# Altium PCB Altium-PCB_PowerSupply_2023-12-20.pcbdoc
Units mm, origin at the board's own origin, x right, y up, seen from the top; angles counter-clockwise.
Board outline 147.32 x 85.72 mm, 2 copper layers (Top Layer, Bottom Layer); 36 components, 23 nets, 101 pads, 0 vias.
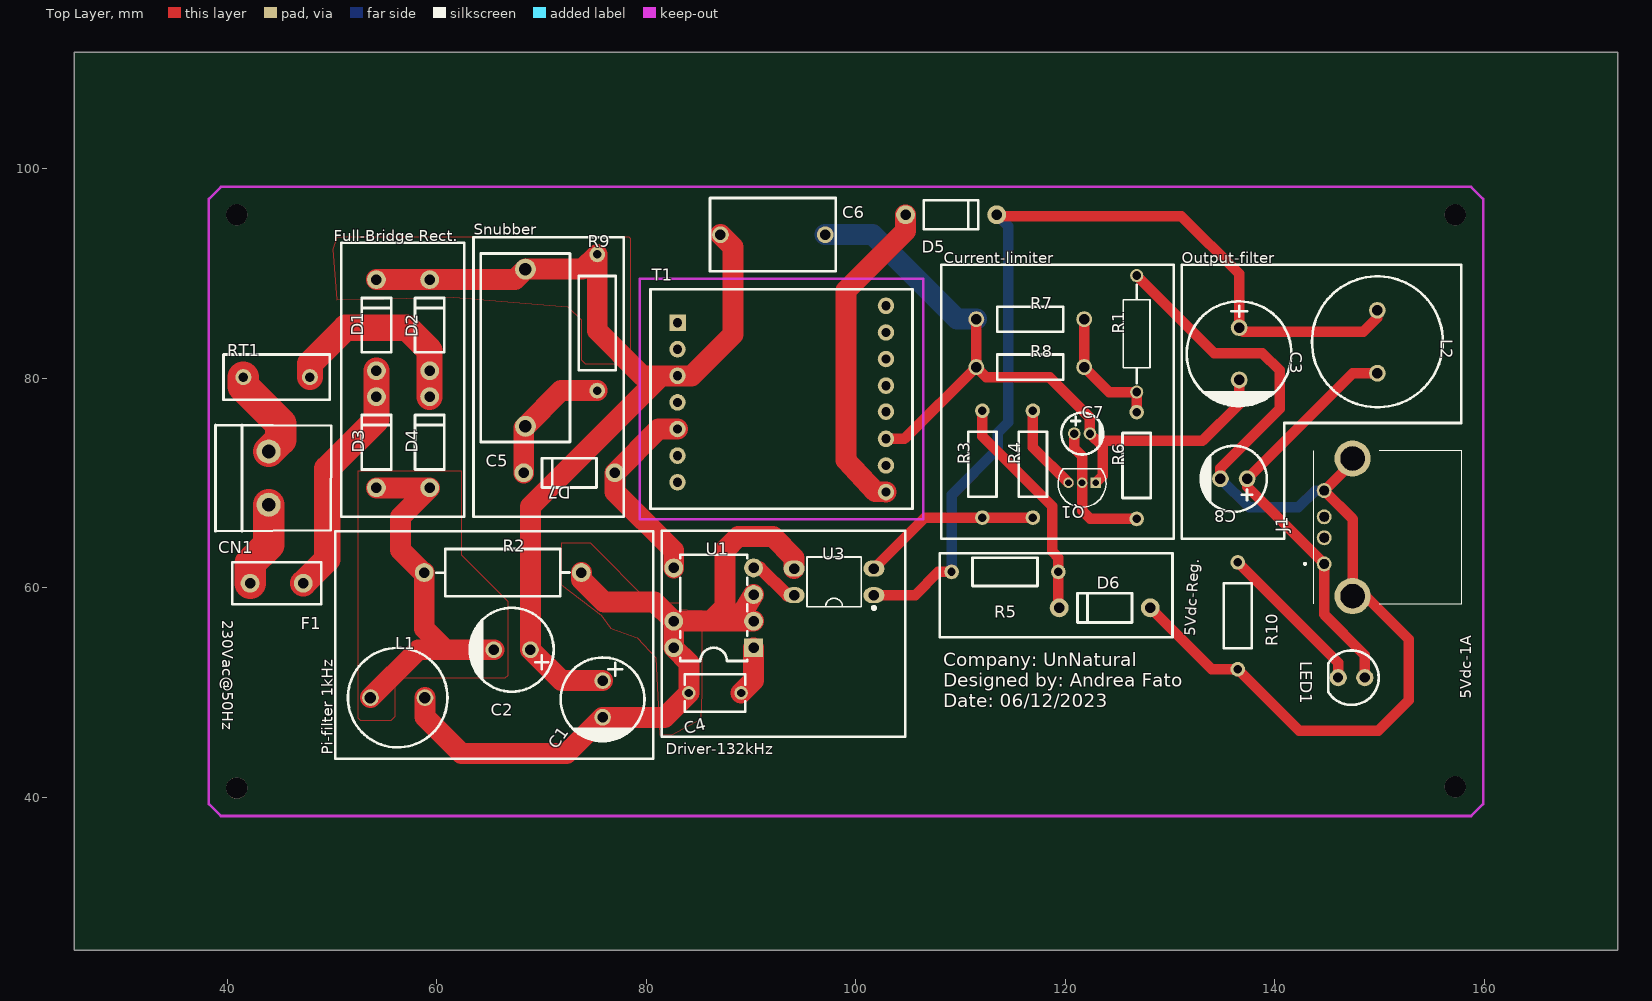
[diagram p0: Top Layer view]
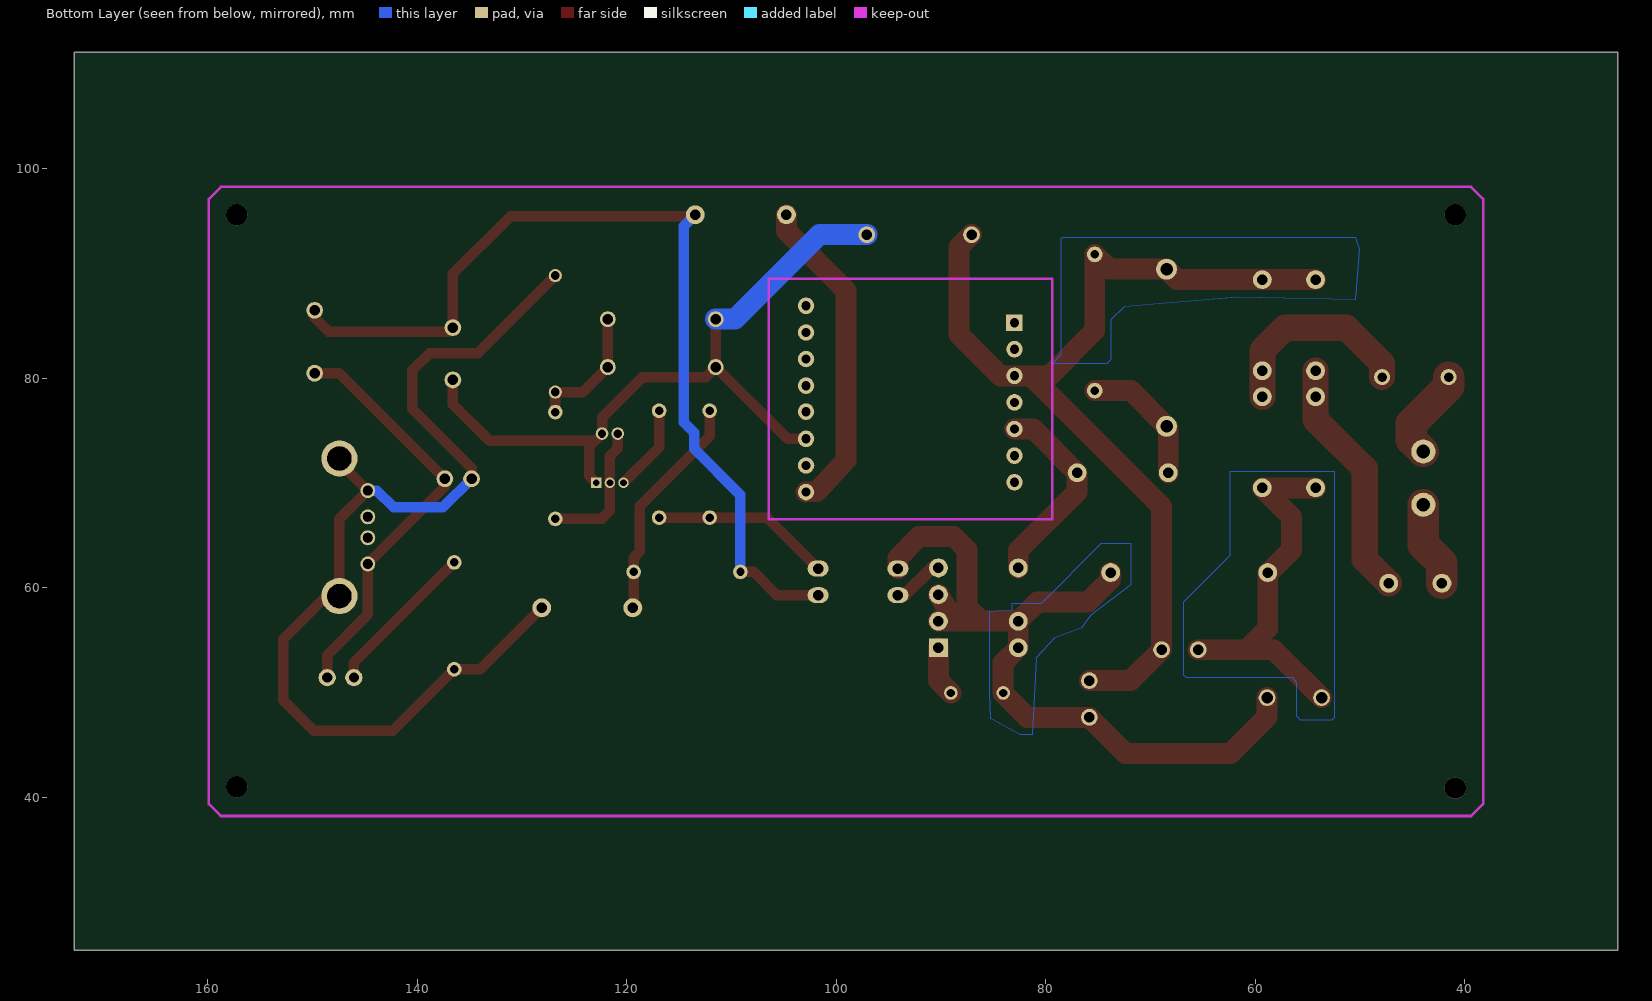
[diagram p1: Bottom Layer view, seen from below]

## Layer stack, top to bottom
Top Layer: signal copper (thickness not stored)
Dielectric: dielectric 0.32, FR-4, Dk 4.8
Bottom Layer: signal copper (thickness not stored)

## Board outline
172.72,25.4 25.4,25.4 25.4,111.125 172.72,111.125

## Components (designator, comment, footprint, x,y, rotation, side; value= is the part's Value field where it differs from the comment)
C1 "3.3uF" CAP-TH_BD8.0-P3.50-D0.6-FD 75.819,49.403 r270 top
C2 "3.3uF" CAP-TH_BD8.0-P3.50-D0.6-FD 67.183,54.102 r180 top
C3 "330uF" CAP-TH_BD10.0-P5.00-D0.6-FD 136.588,82.359 r270 top
C4 "100nF" CAP-TH_L5.8-W3.6-P5.0-D0.6 86.55,49.974 r0 top
C5 "2.2nF" CAP-TH_L18.0-W8.5-P15.00-D1.2 68.453,82.931 r90 top
C6 "2.2nF" CAP-TH_L12.0-W7.0-P10.00-D0.6 92.075,93.726 r0 top
C7 "10uF" CAP-TH_BD4.0-P1.50-D0.8-FD 121.602,74.739 r0 top
C8 "100uF" CAP-TH_BD6.3-P2.50-D1.0-FD 136.081,70.421 r180 top
CN1 "MKDS3/2-5.08" CONN-TH_MKDS3-2-5.08 43.942,70.485 r270 top
D1 "1N4005-T" DO-41_BD2.4-L4.7-P8.70-D0.9-RD 54.229,85.09 r270 top
D2 "1N4005-T" DO-41_BD2.4-L4.7-P8.70-D0.9-RD 59.309,85.09 r270 top
D3 "1N4005-T" DO-41_BD2.4-L4.7-P8.70-D0.9-RD 54.229,73.914 r270 top
D4 "1N4005-T" DO-41_BD2.4-L4.7-P8.70-D0.9-RD 59.309,73.914 r270 top
D5 "1N5819" DO-41_BD2.4-L4.7-P8.70-D0.9-FD 109.093,95.631 r0 top
D6 "BZX79B3V9" DO-41_BD2.4-L4.7-P8.70-D0.9-RD 123.761,58.102 r0 top
D7 "1N4937-E3/54" DO-41_BD2.4-L4.7-P8.70-D0.9-FD 72.644,70.993 r180 top
F1 "SET T2A 250V" FUSE-TH_L8.5-W4.0-P5.08-D0.6 44.704,60.452 r0 top
J1 "USB-A-S-S-B-TH" USBASSBTH 144.716,62.293 r90 top
L1 "2.2mH" IND-TH_BD9.5-P5.20-D0.6 56.261,49.53 r0 top
L2 "3.3uH" IND-TH_BD12.5-P6.00-D0.7 149.796,83.502 r270 top
LED1 "LED-TH-5mm_WHT" LED-TH-5MM_WHT 147.32,51.435 r270 top
Q1 "2N3904" TO-92-3_L4.6-W3.6-P1.30-L_2N3904 121.602,70.04 r180 top
R1 "1Ω" RES-TH_BD2.4-L6.4-P11.12-D0.6 126.809,84.264 r90 top
R2 "1.2kΩ" RES-TH_BD4.5-L11.0-P15.00-D0.7 66.294,61.468 r0 top
R3 "100Ω" RES-TH_BD2.7-L6.2-P10.20-D0.4 112.078,71.819 r90 top
R4 "47Ω" RES-TH_BD2.7-L6.2-P10.20-D0.4 116.903,71.819 r90 top
R5 "270Ω" RES-TH_BD2.7-L6.2-P10.20-D0.4 114.236,61.531 r0 top
R6 "22Ω" RES-TH_BD2.7-L6.2-P10.20-D0.4 126.809,71.691 r90 top
R7 "1.2Ω" RES-TH_BD2.4-L6.3-P10.30-D0.6 116.649,85.661 r0 top
R8 "1.2Ω" RES-TH_BD2.4-L6.3-P10.30-D0.6 116.649,81.09 r0 top
R9 "200kΩ" RES-TH_BD3.5-L9.0-P13.00-D0.5 75.311,85.344 r270 top
R10 "270Ω" RES-TH_BD2.7-L6.2-P10.20-D0.4 136.462,57.34 r270 top
RT1 "NO" "AMPHENOL CL-120" 44.704,80.137 r0 top
T1 "094932" 094932 79.375,89.535 r0 top
U1 "TNY267PN" DIP-8_7P-L9.7-W6.4-P2.54-LS7.6-BL-PE6 86.423,58.102 r90 top
U3 "LTV-817" DIP-4_L4.6-W6.5-P2.54-LS7.6-BL 97.917,60.579 r90 top

## Footprints (in the part's own frame and the unit in brackets; to place one, negate y for a bottom-side part, rotate by r counter-clockwise, add the part's x,y. Pads: shape width x height; smd on the part's side, far side on the other; paste and mask are expansions set on the pad)
094932 [mil]
  rect 62x62 hole 35 paste+0 mask+2: 1(141.73,-165.35)
  round 62 hole 35 paste+0 mask+2: 2(141.73,-265.35) 3(141.73,-365.35) 4(141.73,-465.35) 5(141.73,-565.35) 6(141.73,-665.35) 7(141.73,-765.35) 8(925.2,-802.36) 9(925.2,-702.36) 10(925.2,-602.36) 11(925.2,-500) 12(925.2,-402.36) 13(925.2,-302.36) 14(925.2,-202.36) 15(925.2,-102.36)
  Keep-Out Layer lines w10: 0,-905 0,0 1065,0 1065,-905 0,-905
  silkscreen extent 40,-865 1025,-40
"AMPHENOL CL-120" [mil]
  round 60 hole 36 paste+0 mask+2: 1(-125,0) 2(125,0)
  silkscreen extent -200,-85 200,85
CAP-TH_BD4.0-P1.50-D0.8-FD [mm]
  round 1.2 hole 0.8 paste+0 mask+0.051: 1(-0.75,0) 2(0.75,0)
  silkscreen extent -1.98,-2 2.06,2
CAP-TH_BD6.3-P2.50-D1.0-FD [mm]
  round 1.6 hole 1 paste+0 mask+0.051: 1(-1.27,0) 2(1.27,0)
  silkscreen extent -3.15,-3.15 3.17,3.15
CAP-TH_BD8.0-P3.50-D0.6-FD [mm]
  round 1.6 hole 1 paste+0 mask+0.051: 1(-1.75,0) 2(1.75,0)
  silkscreen extent -3.96,-4 4.04,4
CAP-TH_BD10.0-P5.00-D0.6-FD [mm]
  round 1.6 hole 1 paste+0 mask+0.05: 1(-2.5,0) 2(2.5,0)
  silkscreen extent -5,-5 5.08,5
CAP-TH_L5.8-W3.6-P5.0-D0.6 [mm]
  round 1.3 hole 0.8 paste+0 mask+0.05: 1(-2.5,0) 2(2.5,0)
  silkscreen extent -2.9,-1.8 2.9,1.8
CAP-TH_L12.0-W7.0-P10.00-D0.6 [mm]
  round 1.6 hole 1 paste+0 mask+0.051: 1(-5,0) 2(5,0)
  silkscreen extent -6,-3.5 6,3.5
CAP-TH_L18.0-W8.5-P15.00-D1.2 [mm]
  round 2 hole 1.2 paste+0 mask+0.051: 1(-7.5,0) 2(7.5,0)
  silkscreen extent -9,-4.25 9,4.25
CONN-TH_MKDS3-2-5.08 [mm]
  round 2.3 hole 1.3 paste+0 mask+0.051: 1(-2.54,0) 2(2.54,0)
  silkscreen extent -5.08,-5.08 5.08,5.96
DIP-4_L4.6-W6.5-P2.54-LS7.6-BL [mm]
  oval 1.524x2 hole 1 paste+0 mask+0.051: 1(-1.27,-3.81) 2(1.27,-3.81) 3(1.27,3.81) 4(-1.27,3.81)
  silkscreen extent -2.63,-3.96 2.38,2.58
DIP-8_7P-L9.7-W6.4-P2.54-LS7.6-BL-PE6 [mm]
  rect 1.8x1.8 hole 1 paste+0 mask+0.051: 1(-3.81,-3.81)
  round 1.8 hole 1 paste+0 mask+0.051: 2(-1.27,-3.81) 3(1.27,-3.81) 4(3.81,-3.81) 5(3.81,3.81) 7(-1.27,3.81) 8(-3.81,3.81)
  silkscreen extent -5.08,-3.2 5.08,3.2
DO-41_BD2.4-L4.7-P8.70-D0.9-FD [mm]
  round 1.8 hole 1 paste+0 mask+0.051: 1(-4.35,0) 2(4.35,0)
  silkscreen extent -2.6,-1.4 2.6,1.4
DO-41_BD2.4-L4.7-P8.70-D0.9-RD [mm]
  round 1.8 hole 1 paste+0 mask+0.051: 1(-4.35,0) 2(4.35,0)
  silkscreen extent -2.6,-1.4 2.6,1.4
FUSE-TH_L8.5-W4.0-P5.08-D0.6 [mm]
  round 1.8 hole 1 paste+0 mask+0.051: 1(-2.54,0) 2(2.54,0)
  silkscreen extent -4.25,-2 4.25,2
IND-TH_BD9.5-P5.20-D0.6 [mm]
  round 1.6 hole 1.1 paste+0 mask+0.051: 1(-2.6,0) 2(2.6,0)
  silkscreen extent -4.75,-4.75 4.75,4.75
IND-TH_BD12.5-P6.00-D0.7 [mm]
  round 1.6 hole 1 paste+0 mask+0.051: 1(-3,0) 2(3,0)
  silkscreen extent -6.25,-6.25 6.25,6.25
LED-TH-5MM_WHT [mil]
  round 65 hole 38 paste+0 mask+4: 1(0,50) 2(0,-50)
  silkscreen extent -102,-88 102,102
RES-TH_BD2.4-L6.3-P10.30-D0.6 [mm]
  round 1.524 hole 1 paste+0 mask+0.051: 1(-5.15,0) 2(5.15,0)
  silkscreen extent -3.15,-1.2 3.15,1.2
RES-TH_BD2.4-L6.4-P11.12-D0.6 [mm]
  round 1.26 hole 0.84 paste+0 mask+0.051: 1(-5.56,0) 2(5.56,0)
  silkscreen extent -4.7,-1.27 4.7,1.27
RES-TH_BD2.7-L6.2-P10.20-D0.4 [mm]
  round 1.4 hole 0.8 paste+0 mask+0.051: 1(-5.1,0) 2(5.1,0)
  silkscreen extent -3.1,-1.35 3.1,1.35
RES-TH_BD3.5-L9.0-P13.00-D0.5 [mm]
  round 1.5 hole 0.8 paste+0 mask+0.051: 1(-6.5,0) 2(6.5,0)
  silkscreen extent -4.44,-1.78 4.57,1.78
RES-TH_BD4.5-L11.0-P15.00-D0.7 [mm]
  round 1.8 hole 1 paste+0 mask+0.051: 1(-7.5,0) 2(7.5,0)
  silkscreen extent -6.37,-2.26 6.37,2.24
TO-92-3_L4.6-W3.6-P1.30-L_2N3904 [mm]
  rect 1x1 hole 0.65 paste+0 mask+0.05: 1(-1.3,0)
  round 1 hole 0.65 paste+0 mask+0.05: 2(0,0) 3(1.3,0)
  silkscreen extent -2.28,-1.35 2.28,2.34
USBASSBTH [mm]
  round 1.431 hole 0.92 slot 0.925 at 0 deg paste+0 mask+0.051: 1(0,0) 2(2.5,0) 3(4.5,0) 4(7,0)
  round 3.45 hole 2.3 paste+0 mask+0.051: MH1(-3.07,-2.71) MH2(10.07,-2.71)
  silkscreen extent -3.8,-13.11 10.8,1.89

## Free pads (board coordinates)
  round 2.032 hole 2.032 unplated paste+0: ""(40.894,40.894) ""(40.894,95.631) ""(157.226,41.021) ""(157.226,95.631)

## Nets (pads, with @x,y where several pads share a name; then routed paths per layer and width w, separated by ;. In a path a pad name is that pad's centre, name@x,y a point inside that pad or via, vN(x,y) a via of type N, cw(c..) or ccw(c..) an arc to the next point about the centre after c; other vN are vias at no path point)
CN1_2: CN1.2 F1.1 | length 8.2
  Top Layer w3: F1.1 42.164,62.357 43.942,64.135 CN1.2
D1_1: C1.1 C2.1 C5.2 C6.1 D1.1 D2.1 R9.1 T1.3 | length 96.7
  Top Layer w2: D1.1 D2.1 67.462,89.44 C5.2 73.898,90.431 R9.1 75.311,84.582 79.638,80.255 82.975,80.255 84.319,80.255 88.265,84.201 88.265,92.536 C6.1 ; C1.1 71.882,51.153 C2.1 68.933,67.79 81.399,80.256 T1.3@82.974,80.256
D1_2: D1.2 D3.1 F1.2 | length 23.2
  Top Layer w2.5: F1.2 49.53,62.738 49.53,71.374 54.229,76.073 D3.1 D1.2
D2_2: D2.2 D4.1 RT1.2 | length 19.4
  Top Layer w2.5: RT1.2 47.879,81.407 51.308,84.836 57.15,84.836 59.309,82.677 D2.2 ; D4.1 D2.2
D3_2: C2.2 D3.2 D4.2 L1.1 R2.1 | length 41.8
  Top Layer w2: L1.1 58.233,54.102 C2.2 60.833,54.102 58.793,56.142 R2.1 58.674,61.468 56.515,63.627 56.515,66.77 D4.2 D3.2
D5_1: D5.1 T1.8 | length 30.9
  Top Layer w2: T1.8 101.854,69.192 99.06,72.192 99.06,88.392 104.742,94.074 D5.1
D6_1: D6.1 R3.2 R5.2 | length 21.9
  Top Layer w1: R3.2 112.078,74.486 118.745,67.818 118.745,63.5 119.337,62.908 R5.2 119.337,58.177 D6.1
GND: C8.2 D6.2 J1.4 J1.MH1 J1.MH2 R1.2 R10.2 | length 100.8
  Top Layer w1: R1.2 134.211,82.423 138.811,82.423 140.462,80.772 140.462,77.089 134.81,71.438 C8.2 ; D6.2 133.974,52.24 R10.2 142.347,46.355 149.86,46.355 152.781,49.276 152.781,55.118 148.676,59.223 J1.MH1 ; J1.MH1 147.426,66.584 J1.4 147.426,72.003 J1.MH2
  Bottom Layer w1: C8.2 137.541,67.691 142.24,67.691 143.842,69.293 J1.4
L2_2: C8.1 J1.1 L2.2 LED1.1 | length 40.3
  Top Layer w1: LED1.1 148.59,53.594 144.716,57.468 J1.1 137.35,69.659 C8.1 147.432,80.503 L2.2
LED1_2: LED1.2 R10.1 | length 15
  Top Layer w1: R10.1 146.05,52.852 LED1.2
Q1_1: C3.2 C6.2 C7.2 Q1.1 R7.1 R8.1 T1.10 | length 72
  Top Layer w1: T1.10 104.645,74.235 R8.1 ; R7.1 R8.1 ; C7.2 123.571,73.52 123.571,70.719 Q1.1 ; C3.2 136.588,77.534 133.096,74.041 123.051,74.041 C7.2 122.353,76.275 118.491,80.137 112.452,80.137 R8.1
  Bottom Layer w2: C6.2 101.6,93.726 109.664,85.661 R7.1
Q1_2: C7.1 Q1.2 R6.1 | length 13.2
  Top Layer w1: C7.1 120.852,73.331 121.602,72.581 Q1.2 121.602,67.373 122.385,66.591 R6.1
Q1_3: Q1.3 R4.2 | length 8.3
  Top Layer w1: R4.2 116.903,73.44 Q1.3
R1_1: R1.1 R6.2 R7.2 R8.2 | length 12.5
  Top Layer w1: R7.2 R8.2 124.185,78.704 R1.1 R6.2
R9_2: C5.1 D7.2 R9.2 | length 12.8
  Top Layer w2: D7.2 68.294,75.272 C5.1 71.866,78.844 R9.2
RT1_1: CN1.1 RT1.1 | length 9.1
  Top Layer w3: RT1.1 41.529,79.248 45.085,75.692 45.085,74.168 CN1.1
S$7399: 
U1_1: C4.2 U1.1 | length 4.8
  Top Layer w2: C4.2 90.233,51.158 U1.1
U1_2: C1.2 C4.1 L1.2 R2.2 U1.2 U1.3 U1.7 U1.8 U3.3 | length 77.4
  Top Layer w2: L1.2 58.861,47.692 62.357,44.196 72.362,44.196 C1.2 81.729,47.653 C4.1 84.05,52.856 U1.8 U1.7 ; R2.2 73.794,60.826 75.946,58.674 80.772,58.674 U1.7 ; 85.148,56.832 86.169,56.832 87.503,58.166 87.503,63.627 88.773,64.897 92.075,64.897 94.107,62.865 U3.3 ; 88.709,56.832 U1.3 ; U1.2 U1.7
U1_4: U1.4 U3.4 | length 5
  Top Layer w1.2: U1.4 90.868,61.912 93.472,59.309 U3.4
U1_5: D7.1 T1.5 U1.5 | length 19.1
  Top Layer w2: D7.1 81.176,75.175 T1.5 ; D7.1 76.995,69.182 82.614,63.563 U1.5
U3_1: C3.1 D5.2 L2.1 R5.1 U3.1 | length 90.4
  Top Layer w1: U3.1 105.664,59.309 107.886,61.531 R5.1 ; D5.2 113.57,95.504 131.064,95.504 136.588,89.98 C3.1 136.993,84.455 148.463,84.455 149.796,85.788 L2.1
  Bottom Layer w1: R5.1 109.136,68.877 113.538,73.279 113.538,74.803 114.554,75.819 114.554,94.521 D5.2
U3_2: R3.1 R4.1 U3.2 | length 17.2
  Top Layer w1: U3.2 106.596,66.718 R3.1 R4.1
pads on no net: J1.2 J1.3 T1.1 T1.2 T1.4 T1.6 T1.7 T1.9 T1.11 T1.12 T1.13 T1.14 T1.15

## Polygon pours and split planes (outlines as drawn)
D1_1 on Bottom Layer (solid): 50.038,92.329 50.419,87.503 61.722,87.757 72.517,86.868 73.787,85.598 73.787,81.788 74.168,81.407 79.375,81.407 78.486,82.296 78.486,93.345 78.359,93.472 50.419,93.472
D1_1 on Bottom Layer (solid): 50.038,92.329 50.419,87.503 61.595,87.757 72.517,86.868 73.787,85.598 73.787,81.788 74.168,81.407 79.375,81.407 78.486,82.296 78.486,93.345 78.359,93.472 50.419,93.472
D3_2 on Bottom Layer (solid): 52.451,71.12 52.451,47.625 52.705,47.371 55.626,47.371 56.007,47.752 56.007,50.927 56.388,51.435 66.548,51.435 66.802,51.689 66.802,58.674 62.357,63.119 62.357,71.12 52.451,71.12
U1_2 on Bottom Layer (solid): 71.882,64.262 71.882,60.325 75.692,57.404 76.581,56.134 79.121,55.245 80.899,53.34 81.28,45.974 82.423,45.974 85.217,47.498 85.344,50.038 85.344,57.785 83.185,57.912 83.185,58.547 80.391,58.547 74.676,64.262 71.882,64.262
D1_1 on Top Layer (solid): 50.038,92.329 50.419,87.503 61.595,87.757 72.517,86.868 73.787,85.598 73.787,81.788 74.168,81.407 79.375,81.407 78.486,82.296 78.486,93.345 78.359,93.472 50.419,93.472
D3_2 on Top Layer (solid): 52.451,71.12 52.451,47.625 52.705,47.371 55.626,47.371 56.007,47.752 56.007,50.927 56.388,51.435 66.548,51.435 66.802,51.689 66.802,58.674 62.357,63.119 62.357,71.12 52.451,71.12
U1_2 on Top Layer (solid): 71.882,64.262 71.882,60.325 75.692,57.404 76.581,56.134 79.121,55.245 80.899,53.34 81.28,45.974 82.423,45.974 85.217,47.498 85.344,50.038 85.344,57.785 83.185,57.912 83.185,58.547 80.391,58.547 74.676,64.262 71.882,64.262

## Silkscreen, mask and mechanical layers (free items; w line width, h text height)
Top Overlay:
  lines w0.254: 50.292,43.688 80.645,43.688 80.645,65.405 50.292,65.405 50.292,43.688 ; 50.863,66.802 62.611,66.802 62.611,92.964 50.863,92.964 50.863,66.802 ; 63.5,66.802 77.851,66.802 77.851,93.472 63.5,93.472 63.5,66.802 ; 81.471,45.783 104.712,45.783 104.712,65.468 81.471,65.468 81.471,45.783 ; 108.013,55.308 130.238,55.308 130.238,63.309 108.013,63.309 108.013,55.308 ; 108.14,64.706 130.365,64.706 130.365,90.868 108.14,90.868 108.14,64.706
  lines w0.254 net S$7399: 131.127,64.706 131.127,90.868 157.797,90.868 157.797,75.755 140.906,75.755 140.906,64.706 131.127,64.706
  text "Snubber" at 63.5,93.718 h1.03
  text "Full-Bridge Rect." at 50.165,93.083 h1.03
  text "Current-limiter" at 108.394,90.987 h1.03
  text "Output-filter" at 131.127,90.987 h1.03
  text "230Vac@50Hz" at 39.489,56.896 h1.03 r270
  text "5Vdc-Reg." at 132.405,55.408 h1.03 r87
  text "5Vdc-1A" at 158.758,49.403 h1.03 r90
  text "Company: UnNatural / Designed by: Andrea Fato / Date: 06/12/2023" at 108.331,48.626 h1.3
  text "Driver-132kHz" at 81.852,44.124 h1.03
  text "Pi-filter 1kHz" at 50.046,44.069 h1.03 r90